# EAGLE board ptschematic (EAGLE 9.0.1)
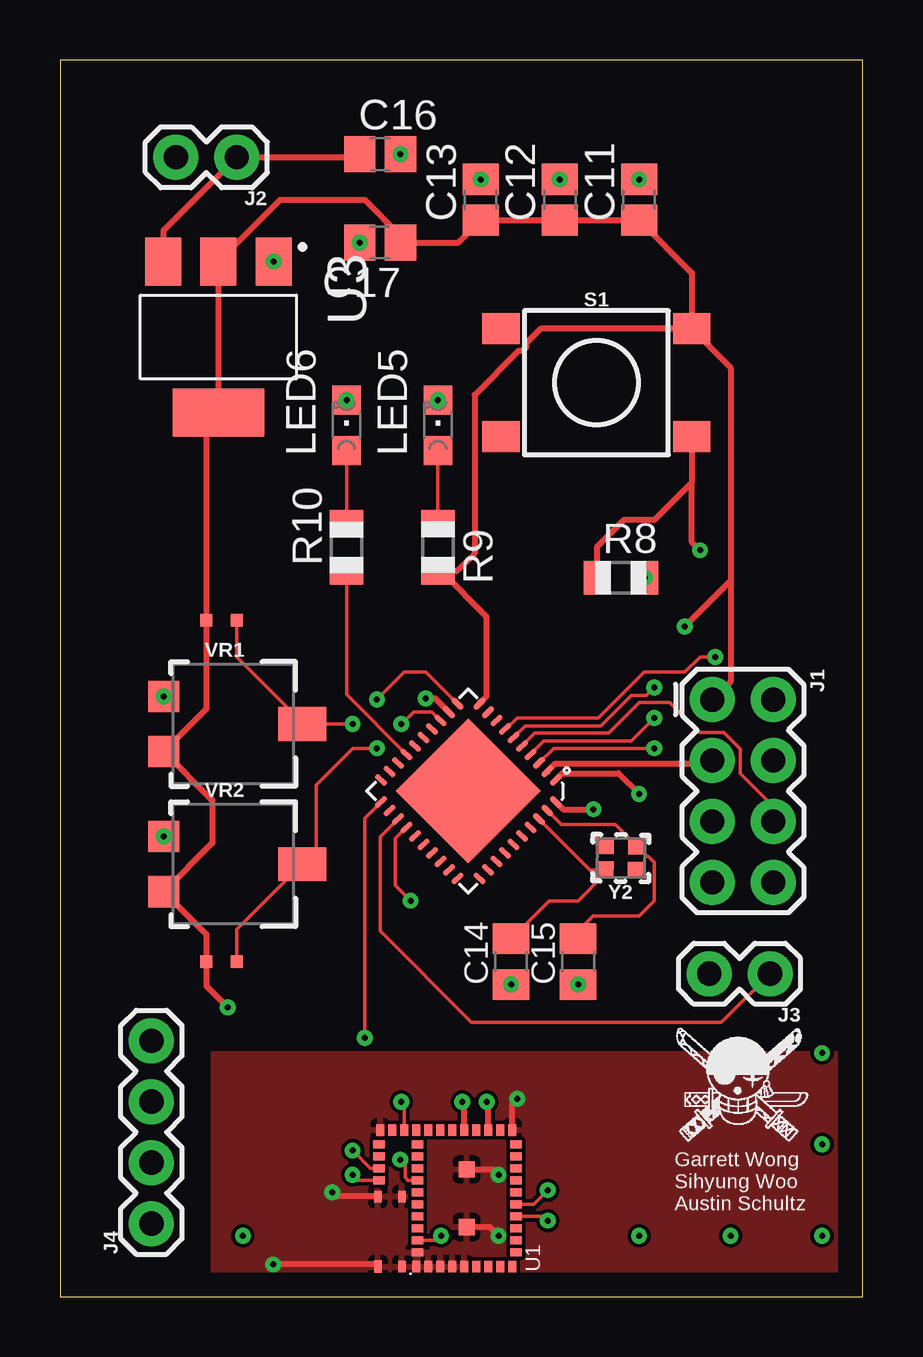
[diagram p0: board, top side]
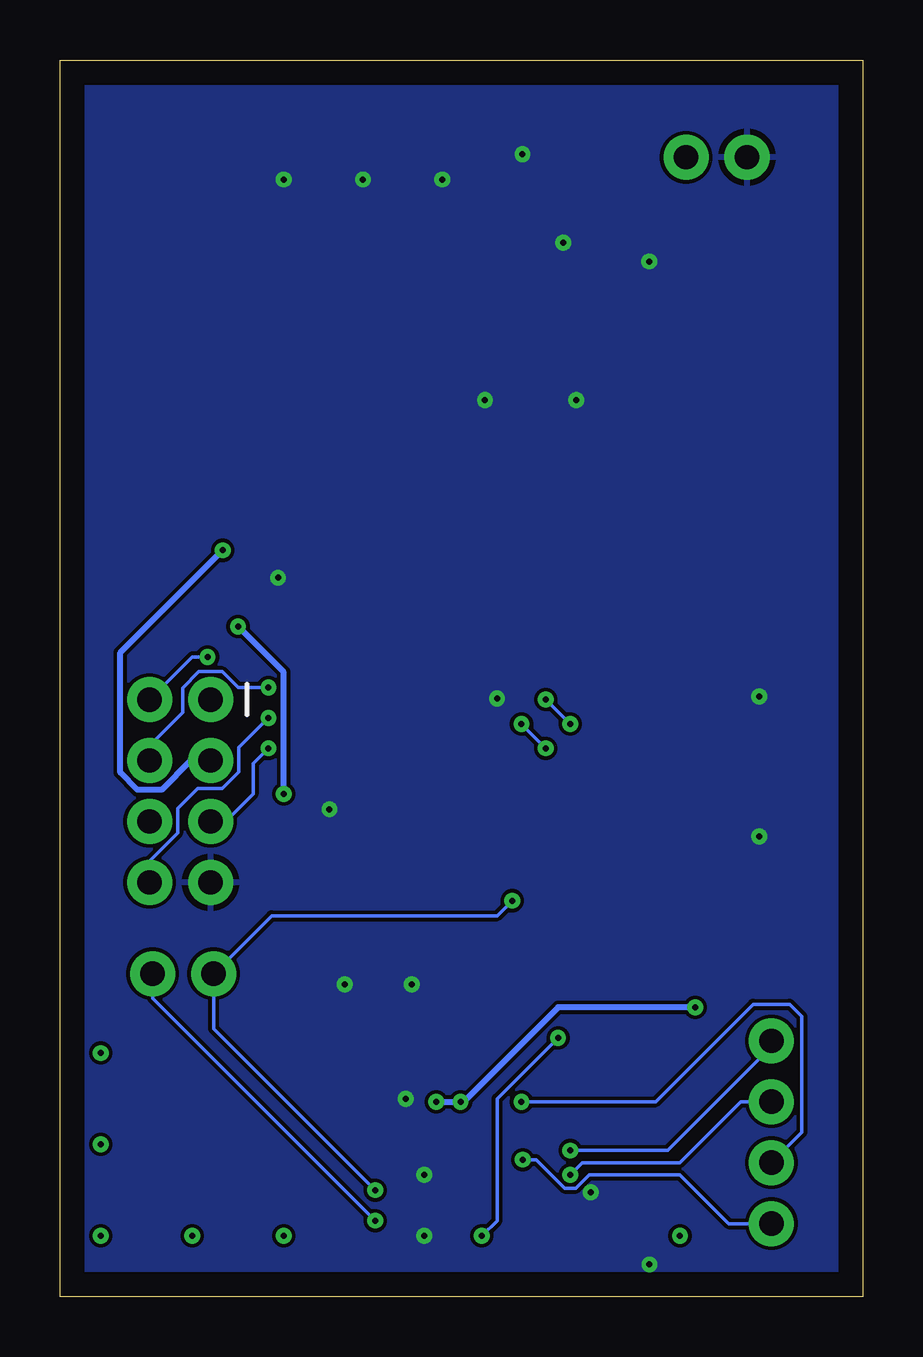
[diagram p1: board, bottom side, seen from below]

Size 33.45 x 51.55 mm. Coordinates in mm from the lower left corner, seen from the top.
Outline: 0,0 33.45,0 33.45,51.55 0,51.55 0,0
Copper layers (1*16): Top 0.035mm / dielectric 1.5mm / Bottom 0.035mm
Design rules "default": minimum track width 6mil, minimum drill 0.35mm, track to track 6mil, track to pad 6mil, pad to pad 6mil, via to via 6mil, smd to smd 6mil, copper to edge 40mil, drill to drill 6mil, minimum pad ring 10mil, minimum via ring 8mil, stop-mask expansion 4mil, vias tented up to drill 0mil, thermal gap 10mil

## Footprints (pad centres in the part's own frame; a part is rotated, then mirrored left to right if it is on the bottom)
C0805 = smd 1.3 x 1.5: 1 -0.85,0; 2 0.85,0
0805 = smd 1.27 x 1.524: 1 -0.953,0; 2 0.953,0
2X4 = drill 1.016 pad 1.88: 1 -3.81,-1.27; 2 -3.81,1.27; 3 -1.27,-1.27; 4 -1.27,1.27; 5 1.27,-1.27; 6 1.27,1.27; 7 3.81,-1.27; 8 3.81,1.27
1X02 = drill 1.016 pad 1.88: 1 0,0; 2 2.54,0
1X04 = drill 1.016 pad 1.88: 1 0,0; 2 2.54,0; 3 5.08,0; 4 7.62,0
CHIPLED_0805 = smd 1.2 x 1.2: A 0,-1.05; C 0,1.05
R0805 = smd 1.1 x 1.4: 1 -1,0; 2 1,0
TACTILE_SWITCH_SMD_6.2MM_TALL = smd 1.55 x 1.3: A1 -3.975,-2.25; A2 3.975,-2.25; B1 -3.975,2.25; B2 3.975,2.25
PAD.02X.02 = smd 0.508 x 0.508: P$1 0,0
BGM13S = smd 0.48 x 0.32: P$1 0,-1.6; P$2 0,-2.1; P$3 0,-2.6; P$4 0,-3.1; P$5 0,-3.6; P$6 0,-4.1; P$7 0,-4.6; P$8 0,-5.1; P$9 0,-5.6; P$20 5.7,-5.6; P$21 5.7,-5.1; P$22 5.7,-4.6; P$23 5.7,-4.1; P$24 5.7,-3.6; P$25 5.7,-3.1; P$26 5.7,-2.6; P$27 5.7,-2.1; P$28 5.7,-1.6; P$29 5.7,-1.1; P$30 5.7,-0.6; P$31 5.7,-0.1; P$46 2.92,0; P$47 0,0; P$48 2.92,-1; P$49 0,-1 | smd 0.32 x 0.48: P$10 0.6,-5.75; P$11 1.1,-5.75; P$12 1.6,-5.75; P$13 2.1,-5.75; P$14 2.6,-5.75; P$15 3.1,-5.75; P$16 3.6,-5.75; P$17 4.1,-5.75; P$18 4.6,-5.75; P$19 5.1,-5.75; P$32 5.1,-0.05; P$33 4.6,-0.05; P$34 4.1,-0.05; P$35 3.6,-0.05; P$36 5.1,-1.65; P$37 4.6,-1.65; P$38 4.1,-1.65; P$39 3.6,-1.65; P$40 3.1,-1.65; P$41 2.6,-1.65; P$42 2.1,-1.65; P$43 1.6,-1.65; P$44 1.1,-1.65; P$45 0.6,-1.65 | smd 0.67 x 0.67: P$50 4.05,-3.7; P$51 1.65,-3.7
SOT230P700X175-4N = smd 2 x 1.5: 1 -3.15,2.3; 2 -3.15,0; 3 -3.15,-2.3 | smd 2 x 3.8: 4 3.15,0
QFN-40 = smd 0.6 x 0.23: 1 -2.9,2.25; 2 -2.9,1.75; 3 -2.9,1.25; 4 -2.9,0.75; 5 -2.9,0.25; 6 -2.9,-0.25; 7 -2.9,-0.75; 8 -2.9,-1.25; 9 -2.9,-1.75; 10 -2.9,-2.25; 21 2.9,-2.25; 22 2.9,-1.75; 23 2.9,-1.25; 24 2.9,-0.75; 25 2.9,-0.25; 26 2.9,0.25; 27 2.9,0.75; 28 2.9,1.25; 29 2.9,1.75; 30 2.9,2.25 | smd 0.23 x 0.6: 11 -2.25,-2.9; 12 -1.75,-2.9; 13 -1.25,-2.9; 14 -0.75,-2.9; 15 -0.25,-2.9; 16 0.25,-2.9; 17 0.75,-2.9; 18 1.25,-2.9; 19 1.75,-2.9; 20 2.25,-2.9; 31 2.25,2.9; 32 1.75,2.9; 33 1.25,2.9; 34 0.75,2.9; 35 0.25,2.9; 36 -0.25,2.9; 37 -0.75,2.9; 38 -1.25,2.9; 39 -1.75,2.9; 40 -2.25,2.9 | smd 4.27 x 4.27: 41 0,0
TRIMPOT-SMD-5MM = smd 1.3 x 1.3: A 1.15,-2.54; C -1.15,-2.54 | smd 1.402 x 2: B 0,3.239
CRYSTAL-SMD-2.0X1.6MM = smd 0.75 x 0.7: 1 -0.675,-0.5; 2 0.675,-0.5; 3 0.675,0.5; 4 -0.675,0.5

## Placement (x,y rotation side)
C11  0.1uF  [C0805]  24.13,45.72 90 top
C12  4.7uF  [C0805]  20.83,45.72 90 top
C13  4.7uF  [C0805]  17.53,45.72 90 top
C14  10pf  [0805]  18.8,13.97 90 top
C15  10pf  [0805]  21.59,13.97 90 top
C16  10 uF  [C0805]  13.34,47.62 0 top
C17  10 uF  [C0805]  13.34,43.94 180 top
J1  [2X4]  28.45,21.08 270 top
J2  [1X02]  7.37,47.5 180 top
J3  [1X02]  29.59,13.46 180 top
J4  [1X04]  3.81,3.05 90 top
LED5  [CHIPLED_0805]  15.75,36.32 0 top
LED6  [CHIPLED_0805]  11.94,36.32 0 top
R8  680  [R0805]  23.37,29.97 0 top
R9  680  [R0805]  15.75,31.24 270 top
R10  680  [R0805]  11.94,31.24 90 top
S1  MOMENTARY-SWITCH-SPST-SMD-6.2MM-TALL  [TACTILE_SWITCH_SMD_6.2MM_TALL]  22.35,38.1 0 top
TP1  TEST-POINT2  [PAD.02X.02]  6.1,13.97 0 top
TP2  TEST-POINT2  [PAD.02X.02]  6.1,28.19 0 top
TP3  TEST-POINT2  [PAD.02X.02]  7.37,13.97 0 top
TP4  TEST-POINT2  [PAD.02X.02]  7.37,28.19 0 top
U1  BGM13S  [BGM13S]  13.25,1.26 90 top
U3  NCP1117LPST33T3G  [SOT230P700X175-4N]  6.6,40.01 270 top
U$1  MSP340FR247  [QFN-40]  17.02,21.08 225 top
VR1  5k  [TRIMPOT-SMD-5MM]  6.86,23.88 270 top
VR2  5k  [TRIMPOT-SMD-5MM]  6.86,18.03 270 top
Y2  32MHz  [CRYSTAL-SMD-2.0X1.6MM]  23.37,18.29 179.2 top

## Library data of the parts
C11-C13 C16 C17 LED5 LED6 R8-R10 = adafruit
C14 C15 = cap-master
J1-J3 TP1-TP4 = SparkFun-Connectors
J4 = SparkFun-Connectors; PROD_ID: CONN-09696
S1 = SparkFun-Switches; PROD_ID: SWCH-11966; SF_SKU: COM-12992
U1 = BMES-Spr2019
U3 = NCP1117LPST33T3G; AVAILABILITY: Unavailable; DESCRIPTION: Linear Voltage Regulator, Positive, LDO, 1.0 A _Fixed and Adjustable_ Vout: 3.3 V; MF: ON Semiconductor; MP: NCP1117LPST33T3G; PACKAGE: SOT-223 ON Semiconductor; PRICE: None
U$1 = ti_msp430fr247
VR1 VR2 = SparkFun-Resistors; PROD_ID: RES-11156
Y2 = SparkFun-Clocks; PROD_ID: XTAL-13459

## Nets
1V8: U1.P$23
3.3V: C11.1 C12.1 C13.1 C17.1 J1.1 R9.2 S1.B2 TP1.P$1 TP2.P$1 U1.P$22 U1.P$24 U3.2 U3.4 U$1.1 U$1.10 VR1.A VR2.A
A1RXD: J3.1 U1.P$13 U$1.23
A1TXD: J3.2 U1.P$14 U$1.24
ADC1: TP4.P$1 U$1.11 VR1.B
ADC2: TP3.P$1 U$1.13 VR2.B
BGMRST: U1.P$44 U$1.21
GND: C11.2 C12.2 C13.2 C14.1 C15.1 C16.2 C17.2 J1.7 J2.2 LED5.C LED6.C R8.2 U1.P$1 U1.P$2 U1.P$3 U1.P$4 U1.P$5 U1.P$20 U1.P$31 U1.P$45 U1.P$46 U1.P$47 U1.P$48 U1.P$49 U1.P$50 U1.P$51 U3.1 U$1.12 U$1.40 VR1.C VR2.C
N$5: J4.4 U1.P$34
N$6: J4.3 U1.P$35
N$7: J4.2 U1.P$29
N$8: J4.1 U1.P$39
N$10: LED5.A R9.1
N$11: C14.2 U$1.38 Y2.3
N$16: C15.2 U$1.39 Y2.1
N$17: R10.1 U$1.17
N$18: LED6.A R10.2
RST: J1.3 R8.1 S1.A2 U$1.2
TCK: J1.8 U$1.4
TDI: J1.4 U$1.6
TDO/TDI: J1.2 U$1.7
TEST: J1.5 U$1.3
TMS: J1.6 U$1.5
VIN: C16.1 J2.1 U3.3

## Tracks (layer width: path | path; a pad name or v marks a point on that pad's centre or on a via)
3.3V  (via drill 0.25)
  Top 0.254: U1.P$24 16.85,8.05 v16.76,8.13 | U1.P$22 17.85,8.06 v17.78,8.13 | S1.B2 26.33,42.67 C11.1 C12.1 C13.1 16.6,43.94 C17.1 14.19,44.23 12.7,45.72 9.17,45.72 U3.2 U3.4 6.1,36.35 TP2.P$1 6.1,24.5 VR1.A 6.35,20.69 6.35,18.92 VR2.A 6.1,15.11 TP1.P$1 6.1,12.95 v6.99,12.06 | S1.B2 20.03,40.35 19.43,39.75 19.43,39.58 19.27,39.42 19.1,39.42 17.27,37.59 17.27,30.99 16.53,30.24 15.88,30.24 | 15.88,30.24 R9.2 | U$1.10 17.78,25.03 17.78,28.34 15.88,30.24 | S1.B2 27.94,38.74 27.94,29.84 | J1.1 27.94,25.65 27.94,29.84 | U$1.1 20.94,21.82 23.27,21.82 v24.13,20.95 | v26.04,27.94 27.94,29.84
  Bottom 0.254: v17.78,8.13 v16.76,8.13 16.64,8.13 12.7,12.06 v6.99,12.06 | v24.13,20.95 24.13,26.04 v26.04,27.94
A1RXD  (via drill 0.25)
  Top 0.152: U1.P$13 20.14,3.36 v20.32,3.17 | J3.1 27.56,11.43 17.14,11.43 13.34,15.24 13.34,19.17 U$1.23
  Bottom 0.152: v20.32,3.17 29.59,12.45 J3.1
A1TXD  (via drill 0.25)
  Top 0.152: U1.P$14 19.73,3.86 v20.32,4.45 | v14.61,16.51 13.97,17.14 13.97,19.09 U$1.24
  Bottom 0.152: v20.32,4.45 27.05,11.18 J3.2 24.64,15.88 15.24,15.88 v14.61,16.51
ADC1  (via drill 0.25)
  Top 0.152: VR1.B 10.16,23.88 | 10.16,23.88 v12.19,23.88 | 16.39,24.89 U$1.11 15.25,26.04 14.35,26.04 v13.21,24.89 | TP4.P$1 7.37,26.67 10.16,23.88
  Bottom 0.152: v12.19,23.88 v13.21,24.89
ADC2  (via drill 0.25)
  Top 0.152: v13.21,22.86 12.19,22.86 10.67,21.34 10.67,18.61 VR2.B 7.37,15.3 TP3.P$1 | U$1.13 15.48,24.38 14.73,24.38 v14.22,23.88
  Bottom 0.152: v13.21,22.86 v14.22,23.88
BGMRST  (via drill 0.25)
  Top 0.152: U1.P$44 15.69,2.36 v15.88,2.54 | U$1.21 12.7,19.95 v12.7,10.79
  Bottom 0.152: v15.88,2.54 15.24,3.17 15.24,8.26 v12.7,10.79
GND  (via drill 0.25)
  Top 0.254: U1.P$20 18.85,8.05 v19.05,8.26 | U1.P$50 18.05,5.31 v18.28,5.08 | U1.P$51 17.91,2.91 v18.28,2.54 | U1.P$47 13.16,1.34 v8.89,1.34 | U1.P$46 11.52,4.18 v11.34,4.36 | U$1.12 15.63,24.94 v15.24,24.94 | U$1.40 20.96,20.32 v22.23,20.32
  other vias: 8.9,43.16 12.48,43.94 14.19,47.62 17.53,46.57 20.83,46.57 24.13,46.57 15.75,37.37 11.94,37.37 24.37,29.97 4.32,25.03 4.32,19.18 18.8,13.02 21.59,13.02
  pour Bottom: 0,0 34.29,0 34.29,2.54 34.29,53.34 -1.27,53.34 -1.27,0
  pour Top: 33.02,0 6.35,0 6.35,10.16 33.02,10.16
N$2  (via drill 0.25)
  other vias: 31.75,2.54
N$3  (via drill 0.25)
  other vias: 31.75,6.35
N$4  (via drill 0.25)
  other vias: 31.75,10.16
N$5  (via drill 0.25)
  Top 0.152: U1.P$34 12.93,5.36 v12.19,6.1
  Bottom 0.152: v12.19,6.1 8.13,6.1 3.81,10.41 J4.4
N$6  (via drill 0.25)
  Top 0.152: U1.P$35 12.41,4.86 v12.19,5.08
  Bottom 0.152: v12.19,5.08 11.68,5.59 7.62,5.59 5.08,8.13 J4.3
N$7  (via drill 0.25)
  Top 0.152: U1.P$29 14.35,8.01 v14.22,8.13
  Bottom 0.152: v14.22,8.13 8.64,8.13 4.57,12.19 3.05,12.19 2.54,11.68 2.54,6.86 J4.2
N$8  (via drill 0.25)
  Top 0.152: U1.P$39 14.5,4.86 14.38,4.98 14.38,5.51 v14.18,5.71
  Bottom 0.152: v14.18,5.71 13.61,5.71 12.42,4.52 11.96,4.52 11.4,5.08 7.62,5.08 5.59,3.05 J4.1
N$9  (via drill 0.25)
  other vias: 27.94,2.54
N$10
  Top 0.152: LED5.A R9.1
N$11
  Top 0.152: U$1.38 22.07,17.8 Y2.3 22.69,17.61 21.59,16.51 20.38,16.51 C14.2
N$12  (via drill 0.25)
  other vias: 24.13,2.54
N$13  (via drill 0.25)
  other vias: 7.62,2.54
N$16
  Top 0.152: U$1.39 20.89,19.68 23.14,19.68 Y2.1 24.48,18.35 24.51,18.35 24.77,18.1 24.77,16.51 24.13,15.88 22.23,15.88 21.59,15.24 C15.2
N$17
  Top 0.152: R10.1 11.94,25.1 U$1.17
N$18
  Top 0.152: LED6.A R10.2
RST  (via drill 0.25)
  Top 0.254: S1.A2 26.33,33.95 | R8.1 22.37,31.26 23.5,32.38 24.77,32.38 26.33,33.95 | U$1.2 20.64,22.23 27.05,22.23 J1.3 | v26.67,31.11 26.33,31.46 26.33,33.95
  Bottom 0.254: J1.3 27.99,22.35 29.21,21.13 30.22,21.13 30.94,21.85 30.94,26.85 v26.67,31.11
TCK  (via drill 0.25)
  Top 0.152: U$1.4 20.16,23.16 23.8,23.16 v24.77,24.13
  Bottom 0.152: v24.77,24.13 26.01,22.89 26.01,21.87 26.69,21.18 27.71,21.18 28.55,20.34 28.55,19.33 29.72,18.16 J1.8
TDI  (via drill 0.25)
  Top 0.152: 19.05,23.5 19.05,23.47 U$1.6 19.38,23.8 | 19.38,23.8 | 19.38,23.8 19.66,23.8 22.53,23.8 23.8,25.07 24.43,25.07 v24.77,25.4
  Bottom 0.152: v24.77,25.4 26.03,25.4 26.69,26.06 27.66,26.06 28.35,25.38 28.35,24.36 29.72,22.99 J1.4
TDO/TDI  (via drill 0.25)
  Top 0.152: U$1.7 18.58,23.66 19.05,24.13 22.43,24.13 23.6,25.3 23.7,25.4 24.33,26.04 26.04,26.04 26.67,26.67 v27.3,26.67
  Bottom 0.152: v27.3,26.67 27.94,26.67 J1.2
TEST  (via drill 0.25)
  Top 0.152: U$1.3 20.56,22.86 v24.77,22.86
  Bottom 0.152: v24.77,22.86 25.4,22.23 25.4,20.95 26.54,19.81 J1.5
TMS
  Top 0.152: J1.6 29.72,20.45 28.35,21.82 28.35,22.84 27.66,23.52 26.64,23.52 25.4,24.77 24.13,24.77 22.86,23.5 19.79,23.5 U$1.5
VIN
  Top 0.254: U3.3 4.3,44.44 J2.1 12.36,47.5 C16.1

## Text on the board
tPlace: Garrett Wong / Sihyung Woo / Austin Schultz